# Altium PCB pcb.PcbDoc
Units mm, origin at the board's own origin, x right, y up, seen from the top; angles counter-clockwise.
Board outline 60.13 x 19.58 mm, 2 copper layers (Top Layer, Bottom Layer); 30 components, 24 nets, 148 pads, 47 vias.
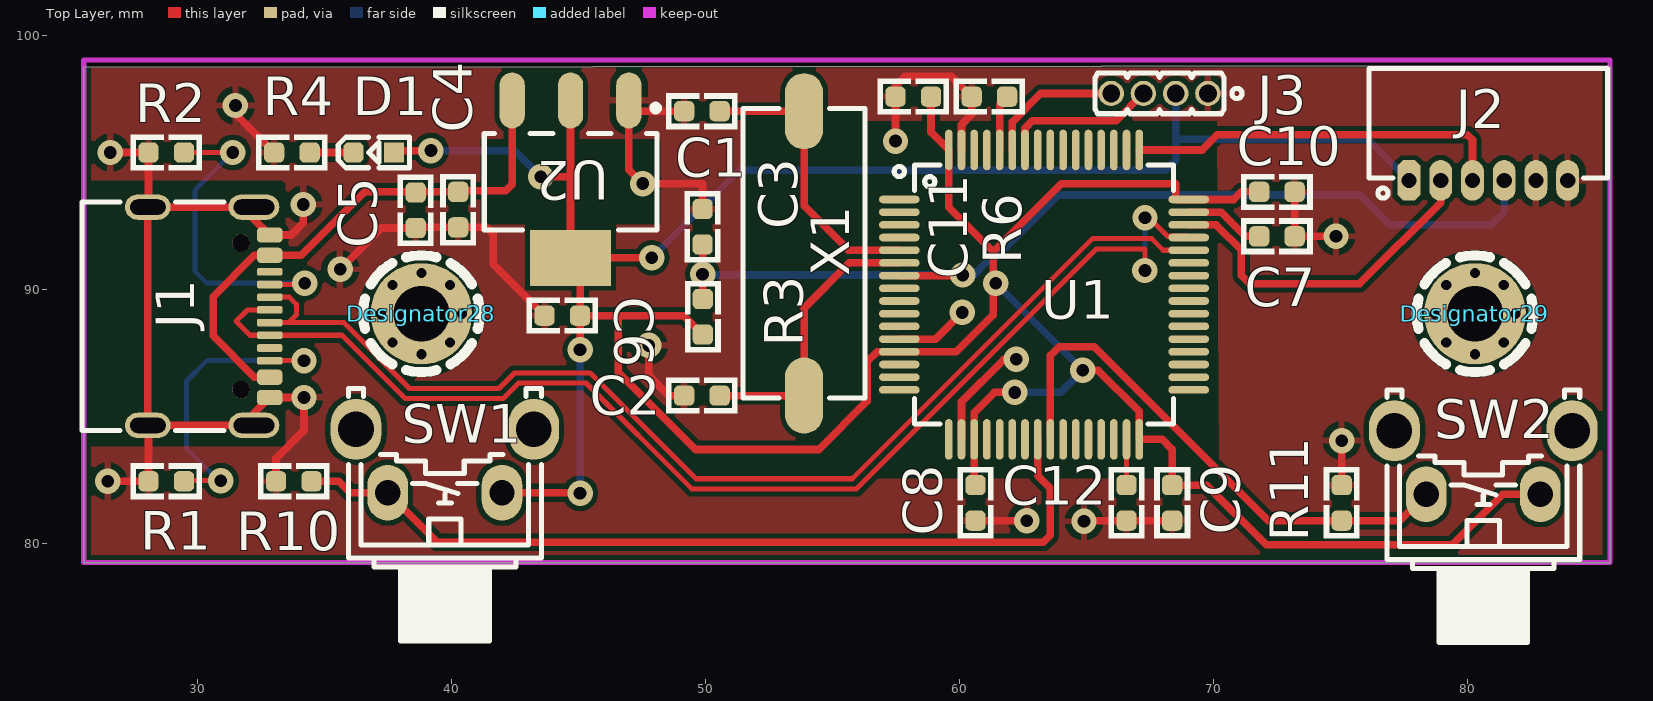
[diagram p0: Top Layer view]
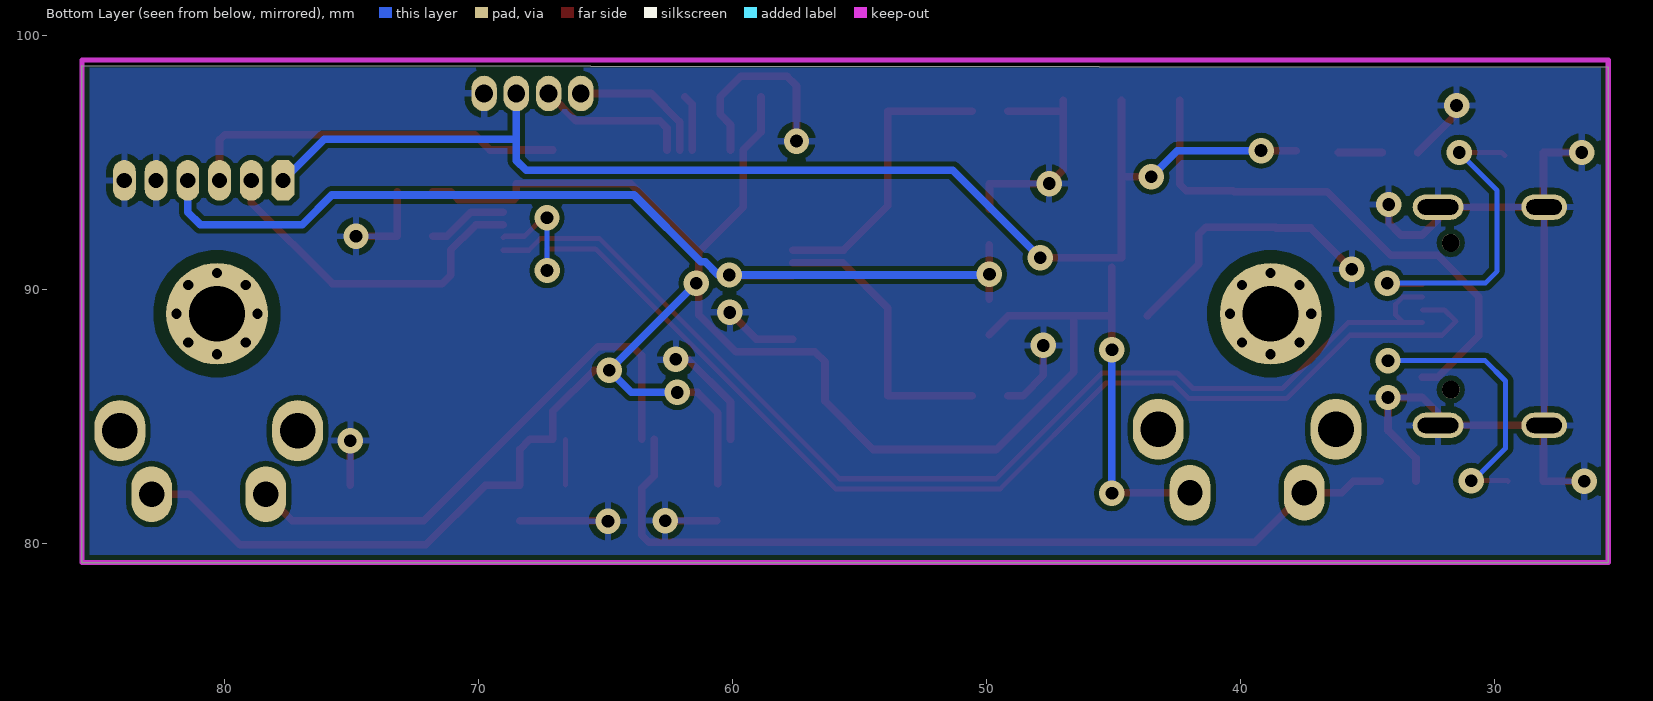
[diagram p1: Bottom Layer view, seen from below]

## Layer stack, top to bottom
Top Solder: solder mask 0.0102, Solder Resist, Dk 3.5
Top Layer: signal copper 0.0356
Dielectric 1: dielectric 0.32, FR-4, Dk 4.8
Bottom Layer: signal copper 0.0356
Bottom Solder: solder mask 0.0102, Solder Resist, Dk 3.5

## Board outline
85.625,98.825 85.625,79.25 25.5,79.25 25.5,98.75

## Design rules (kind name [scope] priority, off if disabled: settings)
Clearance [All] p1: gap=0.2
DiffPairsRouting [All] p1: maxlimit=0.2 minlimit=0.2 mostfreqgap=0.2 toplayer_minwidth=0.2 toplayer_maxwidth=0.2 toplayer_prefwidth=0.2 bottomlayer_minwidth=0.2 bottomlayer_maxwidth=0.2 bottomlayer_prefwidth=0.2 maxuncoupledlength=12.7
MinimumSolderMaskSliver [All] p1: minsoldermaskwidth=0.1
PolygonConnect [All] p1: connectstyle=Relief reliefconductorwidth=0.254 reliefentries=4 polygonreliefangle="90 Angle" airgapwidth=0.254
RoutingVias [All] p1: holewidth=0.5 width=1 viastyle="Through Hole" minholewidth=0.5 minwidth=1 maxholewidth=0.5 maxwidth=1
SilkToSilkClearance [All] p1: silktosilkclearance=0.2
SolderMaskExpansion [All] p1: expansion=0.3
Width [All] p1: maxlimit=0.3 minlimit=0.2 preferedwidth=0.3
27 further rules are at their usual default settings.

## Classes and differential pairs
component class sch: C1 C2 C3 C4 C5 C6 C7 C8 C9 C10 C11 C12 D1 J1 J2 J3 R1 R2 R3 R4 R6 R10 R11 SW1 SW2 U1 U2 X1
differential pair D: +D_P -D_N

## Components (designator, comment, footprint, x,y, rotation, side; value= is the part's Value field where it differs from the comment)
C1 "10pF" C0603 49.85,97.025 r0 top
C2 "10pF" C0603 49.85,85.825 r0 top
C3 "100nF" C0603 49.875,92.475 r270 top
C4 "10nF" C0603 40.25,93.15 r90 top
C5 "10uF" C0603 38.575,93.125 r90 top
C6 "22uF" C0603 44.35,88.975 r0 top
C7 "2.2uF" C0603 72.5,92.1 r180 top
C8 "100nF" C0603 60.625,81.6 r90 top
C9 "100nF" C0603 68.375,81.6 r90 top
C10 "100nF" C0603 72.5,93.85 r180 top
C11 "100nF" C0603 58.175,97.6 r0 top
C12 "2.2uF" C0603 66.575,81.6 r90 top
D1 "LED603RED" LED0603RED 36.925,95.4 r180 top
Designator28 "Comment" SCMH_M2#1 38.8,89.05 r0 top
Designator29 "Comment" SCMH_M2#2 80.3,89.05 r0 top
J1 "USB4105" USBC_SMD_16_USB4105 32.825,88.95 r90 top
J2 "GH_R_6" GH_R_6 80.825,94.3 r0 top
J3 "HDR1X4" HDRMINI_M_1X4 67.875,97.725 r180 top
R1 "5K1" R0603 28.75,82.45 r0 top
R2 "5K1" R0603 28.75,95.4 r0 top
R3 "10K" R0603 49.884,88.928 r270 top
R4 "220" R0603 33.7,95.4 r0 top
R6 "10k" R0603 61.175,97.6 r0 top
R10 "10K" R0603 33.775,82.45 r0 top
R11 "10K" R0603 75.05,81.6 r270 top
SW1 "PUSHBUTTON" SWPBT_SPST_R_6X6X6 39.725,82 r180 top
SW2 "PUSHBUTTON" SWPBT_SPST_R_6X6X6 80.626,81.941 r180 top
U1 "STM32F405RG" QFG50_64 63.325,89.8 r0 top
U2 "LD1117" SOT223_4 44.675,94.25 r270 top
X1 "XTL_8MHz" XTL_2_11X5 53.875,91.425 r270 top

## Footprints (in the part's own frame and the unit in brackets; to place one, negate y for a bottom-side part, rotate by r counter-clockwise, add the part's x,y. Pads: shape width x height; smd on the part's side, far side on the other; paste and mask are expansions set on the pad)
C0603 [mm] "CHIP Capacitor, 1.6X0.8mm, 0603 OPTIMIZED"
  rrect50% 0.8x0.8 smd paste-5 mask+0.075: 1(-0.7,0) 2(0.7,0)
  Top Layer pour cut-out: -0.5,0.4 0.5,0.4 0.5,-0.4 -0.5,-0.4
  silkscreen extent -1.4,-0.7 1.4,0.7, body extent -0.8,-0.4 0.8,0.4, height 0.9
GH_R_6 [mm] "JST GH Series, pitch: 1.25mm, 1.0A/50v, Right Angle"
  oct 0.9x1.6 hole 0.6: 1(-3.125,0)
  oval 0.9x1.6 hole 0.6: 2(-1.875,0) 3(-0.625,0) 4(0.625,0) 5(1.875,0) 6(3.125,0)
  silkscreen extent -4.7,-0.7 4.7,4.4, body extent -4.62,-0.18 4.62,4.32, height 3.33
HDRMINI_M_1X4 [mm] "mini header (50mil pitch)"
  round 1 / inner round 1 / far side oval 1x1.4 hole 0.7 mask+0.05: 1(-1.905,0) 2(-0.635,0) 3(0.635,0) 4(1.905,0)
  silkscreen extent -3.25,-0.8 2.54,0.8, body extent -2.54,-0.64 2.54,0.64, height 7.3
LED0603RED [mm] "LED SMD 0603, RED"
  rect 0.8x0.8 smd paste-5 mask+0.075: 1(-0.8,0)
  rrect50% 0.8x0.8 smd paste-5 mask+0.075: 2(0.8,0)
  silkscreen extent -1.4,-0.6 1.4,0.6, body extent -0.8,-0.4 0.8,0.4, height 0.5
QFG50_64 [mm] "A64 (CYPRESS), TQFP64, LQFP64, VQ44, VQG44, 10X10mm, Pitch: 0.5mm"
  oval 1.6x0.3 smd mask+0.05: 1(-5.7,3.75) 2(-5.7,3.25) 3(-5.7,2.75) 4(-5.7,2.25) 5(-5.7,1.75) 6(-5.7,1.25) 7(-5.7,0.75) 8(-5.7,0.25) 9(-5.7,-0.25) 10(-5.7,-0.75) 11(-5.7,-1.25) 12(-5.7,-1.75) 13(-5.7,-2.25) 14(-5.7,-2.75) 15(-5.7,-3.25) 16(-5.7,-3.75) 33(5.7,-3.75) 34(5.7,-3.25) 35(5.7,-2.75) 36(5.7,-2.25) 37(5.7,-1.75) 38(5.7,-1.25) 39(5.7,-0.75) 40(5.7,-0.25) 41(5.7,0.25) 42(5.7,0.75) 43(5.7,1.25) 44(5.7,1.75) 45(5.7,2.25) 46(5.7,2.75) 47(5.7,3.25) 48(5.7,3.75)
  oval 0.3x1.6 smd mask+0.05: 17(-3.75,-5.7) 18(-3.25,-5.7) 19(-2.75,-5.7) 20(-2.25,-5.7) 21(-1.75,-5.7) 22(-1.25,-5.7) 23(-0.75,-5.7) 24(-0.25,-5.7) 25(0.25,-5.7) 26(0.75,-5.7) 27(1.25,-5.7) 28(1.75,-5.7) 29(2.25,-5.7) 30(2.75,-5.7) 31(3.25,-5.7) 32(3.75,-5.7) 49(3.75,5.7) 50(3.25,5.7) 51(2.75,5.7) 52(2.25,5.7) 53(1.75,5.7) 54(1.25,5.7) 55(0.75,5.7) 56(0.25,5.7) 57(-0.25,5.7) 58(-0.75,5.7) 59(-1.25,5.7) 60(-1.75,5.7) 61(-2.25,5.7) 62(-2.75,5.7) 63(-3.25,5.7) 64(-3.75,5.7)
  silkscreen extent -5.9,-5.1 5.1,5.1, body extent -6,-6 6,6, height 1.6
R0603 [mm] "CHIP Resistor 1/10 WATT, 1.6x0.8mm, 0603, OPTIMIZED"
  rrect50% 0.8x0.8 smd paste-5 mask+0.075: 1(-0.7,0) 2(0.7,0)
  Top Layer pour cut-out: -0.5,0.4 0.5,0.4 0.5,-0.4 -0.5,-0.4
  silkscreen extent -1.4,-0.7 1.4,0.7, body extent -0.85,-0.4 0.85,0.4, height 0.56
SCMH_M2#1 [mm] "SCREW mouting, M2, 2.0mm diameter and 4.0mm PanHead"
  round 4 / inner round 2.5 / far side round 4 hole 2.2 mask+0.1: 1(0,0)
  Top Layer pour cut-out: 0,2.5 -0.957,2.31 -1.768,1.768 -2.31,0.957 -2.5,0 -2.5,0 -2.31,-0.957 -1.768,-1.768 -0.957,-2.31 0,-2.5 0,-2.5 1.25,-2.165 2.165,-1.25 2.5,0 2.5,0 2.31,0.957 1.768,1.768 0.957,2.31 0,2.5
  Bottom Layer pour cut-out: 0,2.5 -0.957,2.31 -1.768,1.768 -2.31,0.957 -2.5,0 -2.5,0 -2.31,-0.957 -1.768,-1.768 -0.957,-2.31 0,-2.5 0,-2.5 1.25,-2.165 2.165,-1.25 2.5,0 2.5,0 2.31,0.957 1.768,1.768 0.957,2.31 0,2.5
  silkscreen extent -2.3,-2.3 2.3,2.3
SCMH_M2#2 [mm] "SCREW mouting, M2, 2.0mm diameter and 4.0mm PanHead"
  round 4 / inner round 2.5 / far side round 4 hole 2.2 mask+0.1: 2(0,0)
  Top Layer pour cut-out: 0,2.5 -0.957,2.31 -1.768,1.768 -2.31,0.957 -2.5,0 -2.5,0 -2.31,-0.957 -1.768,-1.768 -0.957,-2.31 0,-2.5 0,-2.5 1.25,-2.165 2.165,-1.25 2.5,0 2.5,0 2.31,0.957 1.768,1.768 0.957,2.31 0,2.5
  Bottom Layer pour cut-out: 0,2.5 -0.957,2.31 -1.768,1.768 -2.31,0.957 -2.5,0 -2.5,0 -2.31,-0.957 -1.768,-1.768 -0.957,-2.31 0,-2.5 0,-2.5 1.25,-2.165 2.165,-1.25 2.5,0 2.5,0 2.31,0.957 1.768,1.768 0.957,2.31 0,2.5
  silkscreen extent -2.3,-2.3 2.3,2.3
SOT223_4 [mm] "SOT223, 4-Leads, Body 6.5x3.5mm, Pitch 2.30mm"
  oval 2.2x1 smd: 1(-3.2,2.3) 2(-3.2,0) 3(-3.2,-2.3)
  rect 2.2x3.2 smd paste-5: 4(3,0)
  Top Layer pour cut-out: -1.7,3.556 1.7,3.556 1.7,-3.556 -1.7,-3.556
  silkscreen extent -3.02,-3.4 1.9,3.48, body extent -3.5,-3.25 3.5,3.25, height 1.7
SWPBT_SPST_R_6X6X6 [mm] "SWITCH, PUSHBUTTON, THD, SPST, 6X6X5.85mm; 1,000,000 cycles ; 0.98N Force, SKHHLUA010"
  oval 1.6x2.2 hole 1 mask+0.1: 1(-2.25,0) 2(2.25,0)
  oval 2x2.4 hole 1.4 mask+0.1: ""(-3.5,-2.5) ""(3.5,-2.5)
  silkscreen extent -3.8,-4.1 3.8,5.84, body extent -4.25,-4.04 4.25,5.86, height 7.43
USBC_SMD_16_USB4105 [mm] "CONN, USB, Type C, USB4105, popular*"
  rrect50% 0.6x1 smd mask+0.075: A1B12(3.2,0) A4B9(2.4,0) B1A12(-3.2,0) B4A9(-2.4,0)
  rrect50% 0.3x1 smd mask+0.075: A5(1.25,0) A6(0.25,0) A7(-0.25,0) A8(-1.25,0) B5(-1.75,0) B6(-0.75,0) B7(0.75,0) B8(1.75,0)
  oval 1x1.8 hole 0.6 slot 1.4 at 90 deg: SH1(-4.3,4.8) SH2(4.3,4.8)
  oval 1x2 hole 0.6 slot 1.6 at 90 deg: SH3(-4.3,0.62) SH4(4.3,0.62)
  round 0.7 hole 0.7 unplated: ""(-2.89,1.12) ""(2.89,1.12)
  silkscreen extent -4.5,1.8 4.5,7.4, body extent -4.79,-0.3 4.79,7.41, height 3.26
XTL_2_11X5 [mm] "SMD crystal resonator, ABL, ABLS, HC-49, HC49 11X4.5MM"
  oval 3x1.5 smd: 1(-5.6,0) 2(5.6,0)
  silkscreen extent -5.7,-2.4 5.7,2.4, body extent -6.4,-2.41 6.4,2.42, height 4.3

## Part data
C1 C2 C3 C4 C5 C6 C7 C8 C9 C10 C11 C12: library part CAP_SMD_MLCC_0603, "CAP, MLCC"
D1: library part LED_SMD_0603_RED, "LED, SMD, 0603, RED"
J1: library part CONN_USBC_SMD_16_USB4105, "CONN, USB, Type C, USB 2.0, Right-Angle, SMD"
J2: "JST GH Series, pitch: 1.25mm, 1.0A/50v"
J3: library part HDRMINI_M_1X4, "CONN, HEADER, Male, pitch: 1.27mm, 4POS"
R1 R2 R3 R4 R6 R10 R11: library part RES_SMD_0603, "RESISTOR, SMD"
SW1 SW2: library part SWPBT_SPST_R_6X6X6_SKHHLUA010, "SWITCH, PUSH BUTTON, TACTILE, THD, SPST, 6X6X6mm RIGHT"
U2: library part VREG_1117_SOT223, "REG, Linear, LDO1V, 0.8A, SOT-223"
X1: library part XTL_2_HC49_8MHz_SMD, "Crystal MOST POPULAR ABL HC49 PACKAGE"

## Via types
v1: diameter 1, hole 0.5, Top Layer to Bottom Layer, 31 vias
v2: diameter 0.6, hole 0.4, Top Layer to Bottom Layer, 16 vias

## Nets (pads, with @x,y where several pads share a name; then routed paths per layer and width w, separated by ;. In a path a pad name is that pad's centre, name@x,y a point inside that pad or via, vN(x,y) a via of type N, cw(c..) or ccw(c..) an arc to the next point about the centre after c; other vN are vias at no path point)
CC1: J1.A5 R2.2 | length 13.1
  Top Layer w0.2: R2.2@29.575,95.275 29.7,95.4 v1(31.375,95.4) ; J1.A5 34.147,90.2 v1(34.202,90.254)
  Bottom Layer w0.2: v1(31.375,95.4) 29.875,93.9 29.875,90.725 30.346,90.254 v1(34.202,90.254)
CC2: J1.B5 R1.2 | length 12.3
  Top Layer w0.2: R1.2 29.475,82.475 v1(30.9,82.475) ; J1.B5 v1(34.175,87.2)
  Bottom Layer w0.2: v1(30.9,82.475) 30.825,82.475 29.55,83.75 29.55,86.4 30.35,87.2 v1(34.175,87.2)
D_N: J1.A7 J1.B7 U1.44 | length 45.4
  Top Layer w0.2: J1.A7 33.575,88.7 ; J1.B7 33.6,89.7 33.875,89.425 33.875,89 33.575,88.7 ; U1.44 68.021,91.55 67.567,92.005 65.23,92.005 55.775,82.55 49.616,82.55 45.449,86.717 42.467,86.717 41.858,86.108 38.333,86.108 35.741,88.7 33.575,88.7
D_P: J1.A6 J1.B6 U1.45 | length 49.5
  Top Layer w0.2: J1.A6 31.95,89.2 31.5,88.75 32.05,88.2 J1.B6 35.675,88.2 38.167,85.708 42.024,85.708 42.633,86.317 45.283,86.317 49.45,82.15 55.941,82.15 65.395,91.605 67.3,91.605 v1(67.3,90.75) ; v1(67.303,92.83) 67.303,92.803 67.3,92.8 67.489,92.8 68.189,92.1 68.975,92.1 U1.45
  Bottom Layer w0.2: v1(67.3,90.75) 67.303,90.753 v1(67.303,92.83)
GND: C1.1 C2.1 C3.1 C4.1 C5.1 C6.1 C7.1 C8.1 C9.1 C10.1 C11.1 C12.1 J1.A1B12 J1.B1A12 J1.SH1 J1.SH2 J1.SH3 J1.SH4 J2.5 J2.6 J3.1 R1.1 R2.1 R4.1 R6.1 R10.1 R11.1 U1.12 U1.18 U1.63 U2.1 | length 84.9
  Top Layer w0.3: v1(26.45,82.45) R1.1 J1.SH1@28.05,84.625 ; v1(26.55,95.4) R2.1 J1.SH2@28.05,93.275 ; v1(31.475,97.25) 31.475,96.925 R4.1 ; J1.SH3 J1.SH1 J1.SH2 J1.SH4 32.205,92.77 J1.A1B12 33.675,92.15 34.15,92.625 v1(34.15,93.35) ; J1.SH3@32.205,85.13 J1.B1A12 v1(34.175,85.75) 34.175,84.45 33.075,83.35 R10.1 ; v1(35.6,90.8) 37.225,92.425 C5.1 ; C5.1@38.6,92.45 C4.1 41.35,92.45 41.625,92.175 41.625,91 C6.1 ; U2.1 46.975,94.725 v1(47.525,94.175) 49.875,94.175 C3.1 ; U2.1@47.1,97.025 C1.1 ; v1(47.75,87.8) 47.75,86.625 48.55,85.825 C2.1 ; v1(57.475,95.85) C11.1 57.475,98.025 57.85,98.4 59.675,98.4 R6.1 60.475,96.9 60.075,96.5 U1.63 ; U1.12 59.05,88.05 v1(60.1,89.1) ; U1.18 60.075,85.575 61.75,87.25 v1(62.225,87.25) ; C8.1 v1(62.65,80.9) ; v1(64.9,80.875) 64.925,80.9 C12.1 C9.1 ; C10.1 C7.1 v1(74.825,92.1) ; R11.1 v1(75.05,84.05)
NetC1_2: C1.2 U1.5 X1.1 | length 11.5
  Top Layer w0.3: C1.2 X1.1 53.875,93.3 55.625,91.55 U1.5
NetC2_2: C2.2 U1.6 X1.2 | length 11.3
  Top Layer w0.3: C2.2 X1.2 53.875,89.275 55.65,91.05 U1.6
NetC7_2: C7.2 U1.47 | length 3.2
  Top Layer w0.3: U1.47 70.306,93.05 71.256,92.1 C7.2
NetC12_2: C12.2 U1.31 | length 1.8
  Top Layer w0.2: C12.2 U1.31
NetD1_2: D1.2 R4.2 | length 1.7
  Top Layer w0.3: R4.2 D1.2
NetR6_2: R6.2 U1.60 | length 2.2
  Top Layer w0.3: U1.60 61.575,97.3 R6.2
NRST: C3.2 J2.4 R3.1 U1.7 | length 39.5
  Top Layer w0.3: R3.1 C3.2@49.884,91.766 ; U1.7 60.1,90.55 v1(60.125,90.575)
  Bottom Layer w0.3: v1(49.875,90.6) 49.9,90.575 v1(60.125,90.575) 60.548,90.575 61.073,91.1 61.25,91.1 63.875,93.725 75.775,93.725 76.95,92.55 80.95,92.55 81.45,93.05 J2.4
PA4: U1.20
PA5: U1.21
PA6: U1.22
PA7: U1.23
PA13: J2.2 U1.46 | length 13.7
  Top Layer w0.3: U1.46 70.099,92.55 70.175,92.474 71.087,91.562 71.087,90.563 71.425,90.225 75.75,90.225 78.95,93.425 J2.2
PA14: J2.3 U1.49 | length 15.1
  Top Layer w0.3: U1.49 69.55,95.5 70.15,96.1 80,96.1 80.2,95.9 J2.3
PC4: R10.2 SW1.2 U1.24 | length 34.2
  Top Layer w0.3: R10.2 35.55,82.45 36,82 SW1.2 39.425,80.05 63.3,80.05 63.575,80.325 63.575,82.175 63.075,82.675 U1.24
PC5: R11.2 SW2.2 U1.25 | length 21.5
  Top Layer w0.3: U1.25 63.575,87.402 63.923,87.75 65.3,87.75 72.15,80.9 R11.2 77.335,80.9 SW2.2
SCL: J3.3 U1.58 | length 6.1
  Top Layer w0.3: U1.58 62.575,96.357 62.868,96.65 66.165,96.65 J3.3
SDA: J3.4 U1.59 | length 5.5
  Top Layer w0.3: U1.59 62.075,96.6 63.2,97.725 J3.4
VBUS: C4.2 C5.2 J1.A4B9 J1.B4A9 U2.3 | length 21.4
  Top Layer w0.3: J1.B4A9 32.225,86.55 30.6,88.175 30.6,89.725 32.225,91.35 J1.A4B9 34.075,91.35 36.575,93.85 C4.2 40.3,93.9 42.125,93.9 42.375,94.15 U2.3
VCC: C6.2 C8.2 C9.2 C10.2 C11.2 D1.1 J2.1 J3.2 R3.2 SW1.1 SW2.1 U1.13 U1.19 U1.32 U1.48 U1.64 U2.2 U2.4 | length 147.5
  Top Layer w0.3: D1.1@37.8,95.475 v1(39.175,95.475) ; SW1.1 45.075,82 v1(45.05,81.975) ; v1(43.5,94.45) 44.675,94.45 ; U2.2 44.675,94.45 ; v1(45.05,87.625) C6.2 ; U2.4@45.05,90.875 C6.2 ; 46.55,88.975 46.55,86.75 49.6,83.7 54.45,83.7 56.351,85.601 56.351,87.15 56.751,87.55 U1.13 59.875,87.55 61.325,89 61.325,91.5 ; v1(47.875,91.25) U2.4 44.675,94.45 ; R3.2 49.137,88.975 C6.2 ; C11.2 58.875,96.2 U1.64 59.575,93.25 61.287,91.538 ; C8.2@60.575,82.35 U1.19 60.575,85.15 61.375,85.95 v1(62.175,85.95) ; 61.363,91.537 64,94.175 68.51,94.175 68.51,93.64 68.6,93.55 U1.48 70.8,93.55 71.1,93.85 C10.2 ; v1(64.85,86.825) 65.45,86.825 67.075,85.2 U1.32 67.975,84.1 68.375,83.7 C9.2 69.725,82.3 72.075,79.95 79.4,79.95 81.391,81.941 SW2.1
  Bottom Layer w0.3: v1(39.175,95.475) 42.475,95.475 v1(43.5,94.45) ; v1(45.05,81.975) v1(45.05,87.625) ; v1(47.875,91.25) 51.325,94.7 68.125,94.7 68.51,95.085 J3.2 ; v1(61.425,90.25) v1(64.85,86.825) 63.975,85.95 v1(62.175,85.95) ; 68.56,95.925 76.075,95.925 J2.1
pads on no net: Designator28.1 Designator29.2 J1. J1.A8 J1.B8 SW1. SW2. U1.1 U1.2 U1.3 U1.4 U1.8 U1.9 U1.10 U1.11 U1.14 U1.15 U1.16 U1.17 U1.26 U1.27 U1.28 U1.29 U1.30 U1.33 U1.34 U1.35 U1.36 U1.37 U1.38 U1.39 U1.40 U1.41 U1.42 U1.43 U1.50 U1.51 U1.52 U1.53 U1.54 U1.55 U1.56 U1.57 U1.61 U1.62
copper on no net:
  other v2: 38.8,87.45 80.3,87.45 37.669,87.919 39.931,87.919 79.169,87.919 81.431,87.919 37.2,89.05 40.4,89.05 78.7,89.05 81.9,89.05 37.669,90.181 39.931,90.181 79.169,90.181 81.431,90.181 38.8,90.65 80.3,90.65

## Polygon pours and split planes (outlines as drawn)
GND on Bottom Layer "Bottom" (solid, remove dead copper, pour order 8): 25.5,99.05 85.625,99.05 85.625,79.25 25.5,79.25
GND on Top Layer "Bottom" (solid, remove dead copper, pour order 10): 25.5,99.05 25.5,79.25 85.625,79.25 85.625,99.05

## Keep-outs
Keep-Out Layer:
  lines w0.2: 25.5,79.25 85.625,79.25 85.625,98.825 85.625,99.05 25.5,99.05 25.5,79.25

## Other copper
Top Layer:
  pour cut-out: 25.683,83.8 33.45,83.8 33.45,94.175 33.312,94.313 25.683,94.313
  pour cut-out: 70.15,96.65 56.275,96.65 55.775,96.15 55.775,82.55 70.025,82.55 70.225,82.75
  pour cut-out: 56.25,97.125 56.25,85.825 51.575,85.825 51.525,85.775 51.45,85.85 51.45,97.125